# Altium PCB MotherBoard.PcbDoc
Units mm, origin at the board's own origin, x right, y up, seen from the top; angles counter-clockwise.
Board outline 70.48 x 74.55 mm, 2 copper layers (Top Layer, Bottom Layer); 21 components, 28 nets, 97 pads, 3 vias.
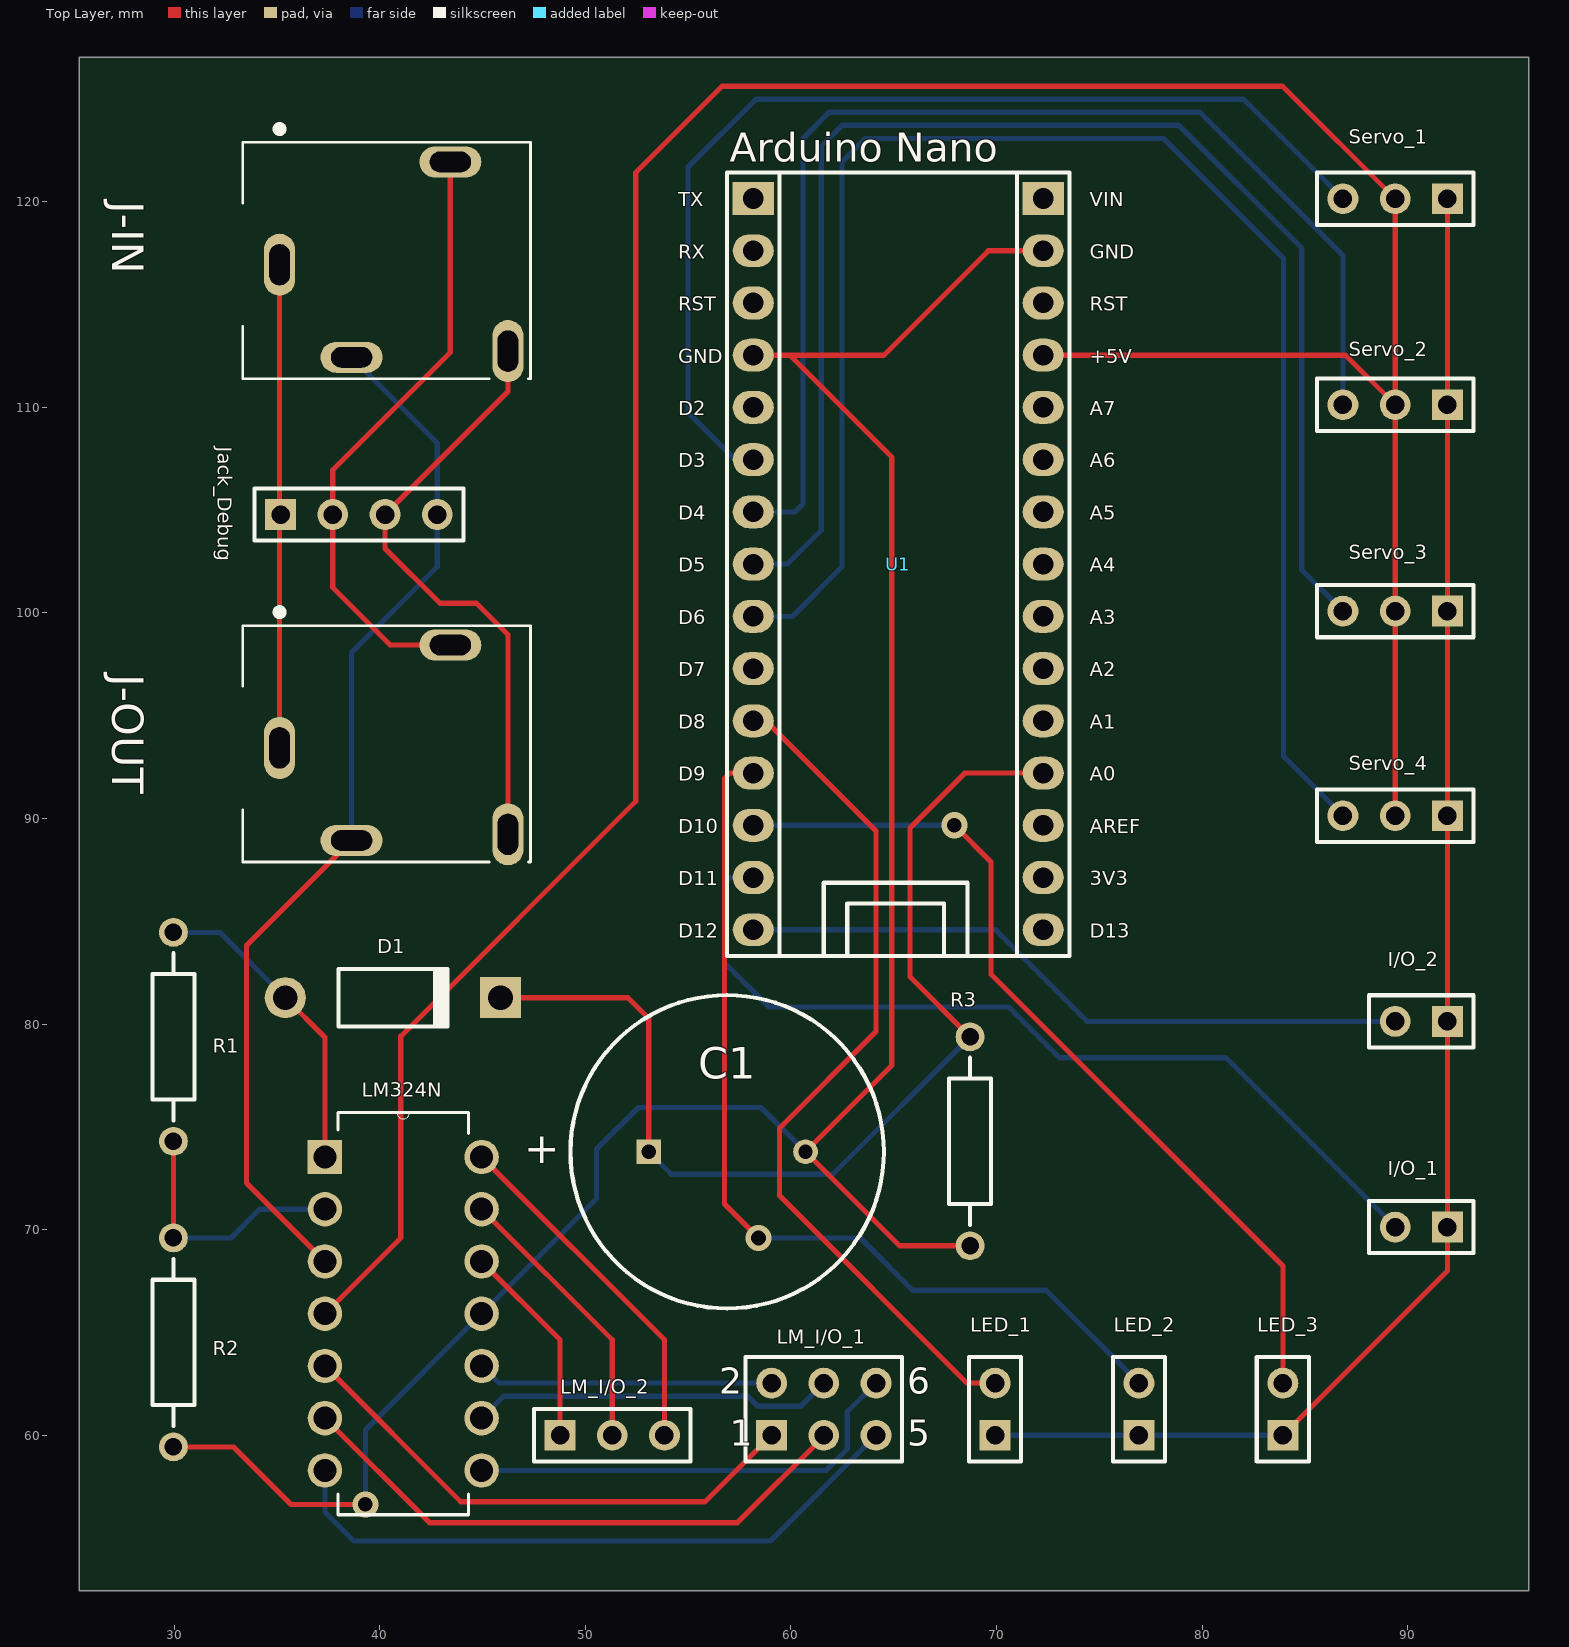
[diagram p0: Top Layer view]
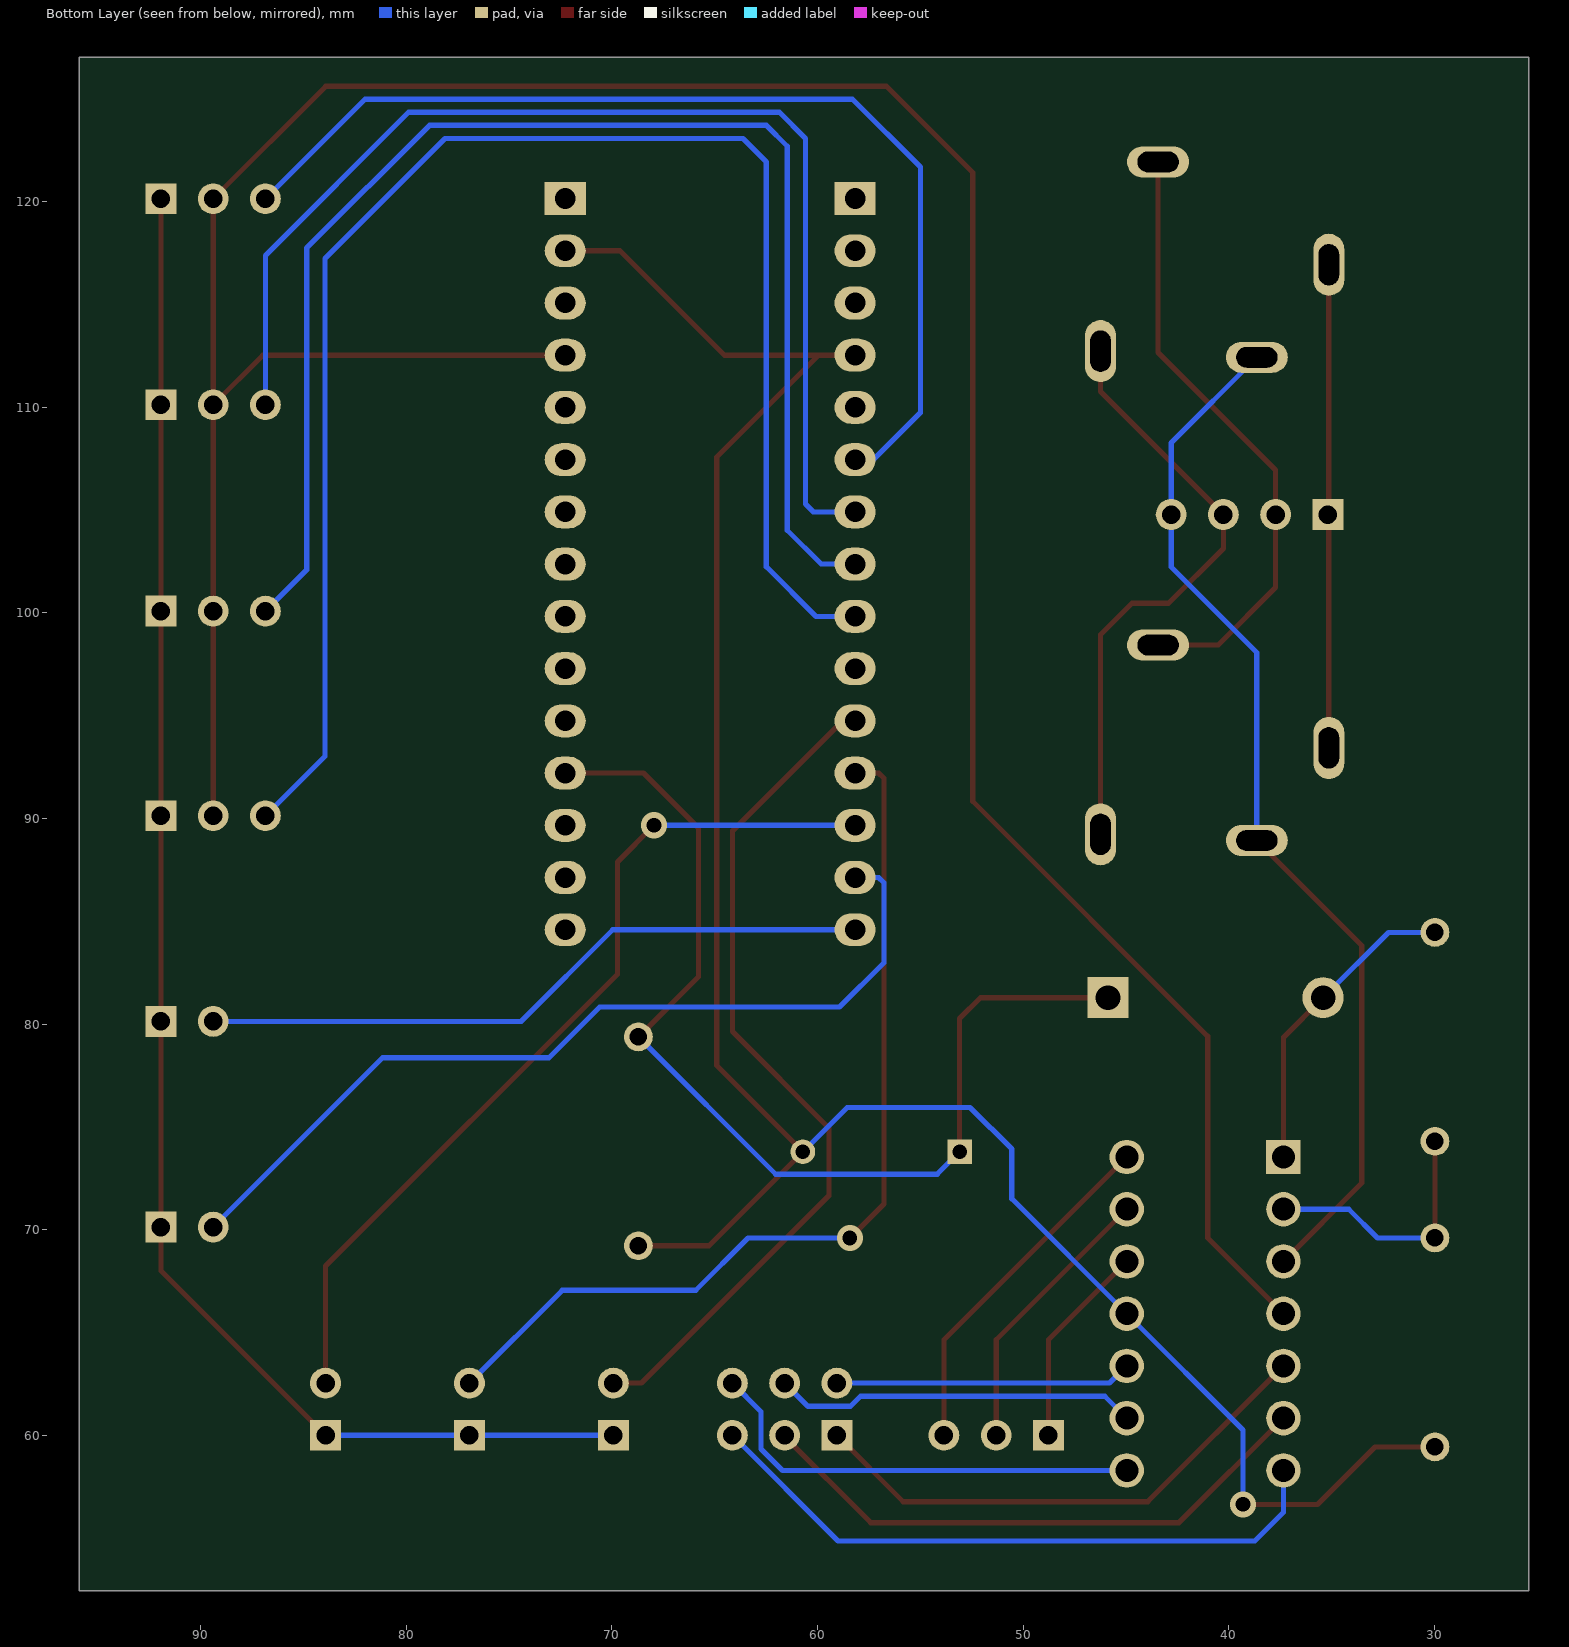
[diagram p1: Bottom Layer view, seen from below]

## Layer stack, top to bottom
Top Solder: solder mask 0.0102, Solder Resist, Dk 3.5
Top Layer: signal copper 0.0356
Dielectric 1: dielectric 0.32, FR-4, Dk 4.8
Bottom Layer: signal copper 0.0356
Bottom Solder: solder mask 0.0102, Solder Resist, Dk 3.5

## Board outline
25.4,52.451 95.885,52.451 95.885,127 25.4,127

## Design rules (kind name [scope] priority, off if disabled: settings)
Clearance [All] p1: gap=0.254 ignorepadtopadclearanceinfootprint=FALSE except(0: Arc-Hole Track-Hole SMDPad-Hole THPad-Hole Via-Hole Fill-Hole Poly-Hole Region-Hole Text-Hole)
PolygonConnect [All] p1: connectstyle=Relief reliefconductorwidth=0.254 reliefentries=4 polygonreliefangle="90 Angle" airgapwidth=0.254
RoutingVias [All] p1: holewidth=0.711 width=1.27 viastyle="Through Hole" minholewidth=0.711 minwidth=1.27 maxholewidth=0.711 maxwidth=1.27
SolderMaskExpansion [All] p1: expansion=0.102
Width [All] p1: maxlimit=0.254 minlimit=0.254 preferedwidth=0.254
30 further rules are at their usual default settings.

## Components (designator, comment, footprint, x,y, rotation, side; value= is the part's Value field where it differs from the comment)
C1 "Cap Pol1" RB7.6-15 56.896,73.787 r180 top value=47uF
D1 "Diode 1N4001" DO-41 40.64,81.28 r0 top
I/O_1 "I/O 1" HDR1X2 91.92,70.127 r180 top
I/O_2 "I/O 2" HDR1X2 91.92,80.127 r180 top
J-IN "SJ1-3514N" CUI_SJ1-3514N 35.134,116.92 r0 top
J-OUT "SJ1-3514N" CUI_SJ1-3514N 35.134,93.425 r0 top
Jack_Debug "Header 4" HDR1X4 35.179,104.775 r0 top
LED_1 "LED 1" HDR1X2 69.92,60 r90 top
LED_2 "LED 2" HDR1X2 76.92,60 r90 top
LED_3 "LED 3" HDR1X2 83.92,60 r90 top
LM324N "LM324N" DIP254P762X508-14 44.958,58.293 r0 top
LM_I/O_1 "Header 3X2" HDR2X3 59.055,60 r0 top
LM_I/O_2 "Header 3" HDR1X3 48.768,60 r0 top
R1 "Res2" AXIAL-0.4 29.972,79.375 r90 top value=46K
R2 "Res2" AXIAL-0.4 29.972,64.516 r270 top value=4.7K
R3 "Res2" AXIAL-0.4 68.707,74.295 r90 top value=3K
Servo_1 "Servo_1" HDR1X3 91.92,120.127 r180 top
Servo_2 "Servo_2" HDR1X3 91.92,110.109 r180 top
Servo_3 "Servo_3" HDR1X3 91.92,100.076 r180 top
Servo_4 "Servo_4" HDR1X3 91.92,90.127 r180 top
U1 "Arduino Nano" PCBCOMPONENT_1 65.024,101.346 r90 top

## Footprints (in the part's own frame and the unit in brackets; to place one, negate y for a bottom-side part, rotate by r counter-clockwise, add the part's x,y. Pads: shape width x height; smd on the part's side, far side on the other; paste and mask are expansions set on the pad)
AXIAL-0.4 [mm] "Axial Device, Thru-Hole; 2 Leads; 0.4 in Pin Spacing"
  round 1.4 hole 0.85: 1(-5.08,0) 2(5.08,0)
  silkscreen extent -4.06,-1.02 4.06,1.02
CUI_SJ1-3514N [mm]
  oval 1.508x3.016 hole 1 slot 2 at 90 deg: 1(0,0) 4(11.1,-4.2)
  oval 3.016x1.508 hole 1 slot 2 at 0 deg: 2(3.5,-4.5) 3(8.3,5)
  silkscreen extent -1.8,-5.55 12.2,6.77
DIP254P762X508-14 [mil]
  rect 66x66 hole 44: 1(-300,600)
  round 66 hole 44: 2(-300,500) 3(-300,400) 4(-300,300) 5(-300,200) 6(-300,100) 7(-300,0) 8(0,0) 9(0,100) 10(0,200) 11(0,300) 12(0,400) 13(0,500) 14(0,600)
  silkscreen extent -275,-85 -25,685
DO-41 [mm] "Diode, Axial; Body 5.2 x 2.7 mm (LxDia. max), Lead Dia. 0.86 mm (max)"
  round 2 hole 1.2: 1(-5.23,0)
  rect 2x2 hole 1.2: 2(5.23,0)
  silkscreen extent -2.65,-1.4 2.75,1.4
HDR1X2 [mm] "Connector; Header; 2 Position"
  rect 1.5x1.5 hole 0.9: 1(0,0)
  round 1.5 hole 0.9: 2(2.54,0)
  silkscreen extent -1.27,-1.27 3.81,1.27
HDR1X3 [mm] "Connector; Header; 3 Position"
  rect 1.5x1.5 hole 0.9: 1(0,0)
  round 1.5 hole 0.9: 2(2.54,0) 3(5.08,0)
  silkscreen extent -1.27,-1.27 6.35,1.27
HDR1X4 [mm] "Connector; Header; 4 Position"
  rect 1.5x1.5 hole 0.9: 1(0,0)
  round 1.5 hole 0.9: 2(2.54,0) 3(5.08,0) 4(7.62,0)
  silkscreen extent -1.27,-1.27 8.89,1.27
HDR2X3 [mm] "Connector; Header; 3x2 Position"
  rect 1.5x1.5 hole 0.9: 1(0,0)
  round 1.5 hole 0.9: 2(0,2.54) 3(2.54,0) 4(2.54,2.54) 5(5.08,0) 6(5.08,2.54)
  silkscreen extent -1.27,-1.27 6.35,3.81
PCBCOMPONENT_1 [mm]
  rect 1.6x2 hole 1: 1(18.796,6.858) 30(18.796,-7.239)
  oval 1.6x2 hole 1: 2(16.256,6.858) 3(13.716,6.858) 4(11.176,6.858) 5(8.636,6.858) 6(6.096,6.858) 7(3.556,6.858) 8(1.016,6.858) 9(-1.524,6.858) 10(-4.064,6.858) 11(-6.604,6.858) 12(-9.144,6.858) 13(-11.684,6.858) 14(-14.224,6.858) 15(-16.764,6.858) 16(-16.764,-7.239) 17(-14.224,-7.239) 18(-11.684,-7.239) 19(-9.144,-7.239) 20(-6.604,-7.239) 21(-4.064,-7.239) 22(-1.524,-7.239) 23(1.016,-7.239) 24(3.556,-7.239) 25(6.096,-7.239) 26(8.636,-7.239) 27(11.176,-7.239) 28(13.716,-7.239) 29(16.256,-7.239)
  silkscreen extent -18.03,-8.51 20.07,8.13
RB7.6-15 [mm] "Polarized Capacitor (Radial); 2 Leads"
  rect 1.2x1.2 hole 0.7: 1(3.81,0)
  round 1.2 hole 0.7: 2(-3.81,0)
  silkscreen extent -7.62,-7.62 7.62,7.62

## Part data
C1: "Polarized Capacitor (Radial)", LatestRevisionDate=17-Jul-2002, LatestRevisionNote="Re-released for DXP Platform.", PackageDescription="Polarized Capacitor (Radial); 2 Leads", PackageReference=RB7.6-15, Published=8-Jun-2000, Publisher="Altium Limited"
D1: "1 Amp General Purpose Rectifier", Code_JEDEC=DO-204-AL, ComponentLink1Description="Manufacturer Link", ComponentLink1URL=http://www.fairchildsemi.com/, ComponentLink2Description=Datasheet, ComponentLink2URL=http://www.fairchildsemi.com/ds/1N%2F1N4001.pdf, DatasheetVersion=1998, LatestRevisionDate=17-Jul-2002, LatestRevisionNote="Re-released for DXP Platform.", PackageDescription="Diode, Axial; Body 5.2 x 2.7 mm (LxDia. max), Lead Dia. 0.86 mm (max)", PackageReference=DO-41, PackageVersion=Aug-1999, Published=8-Jun-2000, Publisher="Altium Limited"
I/O_1 I/O_2 LED_1 LED_2 LED_3: library part "Header 2", "Header, 2-Pin", LatestRevisionDate=17-Jul-2002, LatestRevisionNote="Re-released for DXP Platform.", Publisher="Altium Limited"
J-IN J-OUT: "3.5 mm, Stereo, Right Angle, Through Hole, Audio Jack Connector", Package=None, Availability=Unavailable, CUI_purchase_URL=https://www.cuidevices.com/product/interconnect/connectors/audio-connectors/jacks/sj1-351xn-series?utm_source=snapeda.com&utm_medium=referral&utm_campaign=snapedaBOM, MF="CUI Devices", MP=SJ1-3514N, Price=None, SnapEDA_Link=https://www.snapeda.com/parts/SJ1-3514N/CUI%20Devices/view-part/617955/?ref=snap
Jack_Debug: "Header, 4-Pin", LatestRevisionDate=17-Jul-2002, LatestRevisionNote="Re-released for DXP Platform.", Publisher="Altium Limited"
LM324N: "General Purpose Amplifier 4 Circuit 14-PDIP", Package="DIP-14 Texas Instruments", Availability=Unavailable, MF="Texas Instruments", MP=LM324N/NOPB, Price=None, SnapEDA_Link=https://www.snapeda.com/parts/LM324N/NOPB/Texas%20Instruments/view-part/18367/?ref=snap
LM_I/O_1: "Header, 3-Pin, Dual row", LatestRevisionDate=17-Jul-2002, LatestRevisionNote="Re-released for DXP Platform.", Publisher="Altium Limited"
LM_I/O_2: "Header, 3-Pin", LatestRevisionDate=17-Jul-2002, LatestRevisionNote="Re-released for DXP Platform.", Publisher="Altium Limited"
R1 R2 R3: "Resistor", LatestRevisionDate=17-Jul-2002, LatestRevisionNote="Re-released for DXP Platform.", PackageDescription="Axial Device, Thru-Hole; 2 Leads; 0.4 in Pin Spacing", PackageReference=AXIAL-0.4, Published=8-Jun-2000, Publisher="Altium Limited"
Servo_1 Servo_2 Servo_3 Servo_4: library part "Header 3", "Header, 3-Pin", LatestRevisionDate=17-Jul-2002, LatestRevisionNote="Re-released for DXP Platform.", Publisher="Altium Limited"
U1: library part Component_1

## Via types
v1: diameter 1.27, hole 0.711, Top Layer to Bottom Layer, 3 vias

## Nets (pads, with @x,y where several pads share a name; then routed paths per layer and width w, separated by ;. In a path a pad name is that pad's centre, name@x,y a point inside that pad or via, vN(x,y) a via of type N, cw(c..) or ccw(c..) an arc to the next point about the centre after c; other vN are vias at no path point)
GND: C1.2 LM324N.11 R2.2 R3.1 U1.4 U1.29 | length 112.9
  Top Layer w0.254: R2.2 32.893,59.436 35.687,56.642 v1(39.306,56.642) ; U1.4 59.944,112.522 ; R3.1 65.278,69.215 C1.2 64.897,77.978 64.897,107.569 59.944,112.522 ; U1.29 69.596,117.602 64.516,112.522 59.944,112.522
  Bottom Layer w0.254: v1(39.306,56.642) 39.306,60.261 LM324N.11 50.546,71.501 50.546,73.914 52.578,75.946 58.547,75.946 C1.2
NetC1_1: C1.1 D1.2 R3.2 U1.19 | length 51.9
  Top Layer w0.254: D1.2 52.07,81.28 53.086,80.264 C1.1 ; R3.2 65.786,82.296 65.786,89.535 68.453,92.202 U1.19
  Bottom Layer w0.254: C1.1 54.178,72.695 62.027,72.695 R3.2
NetD1_1: D1.1 LM324N.1 R1.2 | length 15.3
  Top Layer w0.254: D1.1 37.338,79.352 LM324N.1
  Bottom Layer w0.254: R1.2 32.235,84.455 D1.1
NetI/O_1_1: I/O_1.1 I/O_2.1 LED_1.1 LED_2.1 LED_3.1 Servo_1.1 Servo_2.1 Servo_3.1 Servo_4.1 | length 77.4
  Top Layer w0.254: LED_3.1 91.92,68 I/O_1.1 I/O_2.1 Servo_4.1 Servo_3.1 Servo_2.1 Servo_1.1
  Bottom Layer w0.254: LED_1.1 LED_2.1 LED_3.1
NetI/O_1_2: I/O_1.2 U1.14 | length 43.3
  Bottom Layer w0.254: U1.14 57.023,87.122 56.769,86.868 56.769,82.982 58.928,80.823 70.587,80.823 73.05,78.359 81.148,78.359 I/O_1.2
NetI/O_2_2: I/O_2.2 U1.15 | length 33.1
  Bottom Layer w0.254: U1.15 69.952,84.582 74.407,80.127 I/O_2.2
NetJ-IN_1: J-IN.1 J-OUT.1 Jack_Debug.1 | length 23.5
  Top Layer w0.254: J-OUT.1 35.134,104.73 Jack_Debug.1 35.134,104.82 J-IN.1
NetJ-IN_2: J-IN.2 J-OUT.2 Jack_Debug.4 LM324N.3 | length 51.1
  Top Layer w0.254: LM324N.3 33.528,72.263 33.528,83.819 J-OUT.2
  Bottom Layer w0.254: J-OUT.2 38.634,98.07 42.799,102.235 Jack_Debug.4 42.799,108.255 J-IN.2
NetJ-IN_3: J-IN.3 J-OUT.3 Jack_Debug.2 | length 29.9
  Top Layer w0.254: J-OUT.3 40.513,98.425 37.719,101.219 Jack_Debug.2 37.719,106.934 43.434,112.649 J-IN.3
NetJ-IN_4: J-IN.4 J-OUT.4 Jack_Debug.3 | length 29.5
  Top Layer w0.254: J-OUT.4 46.234,98.927 44.704,100.457 42.926,100.457 40.259,103.124 Jack_Debug.3 46.234,110.75 J-IN.4
NetLED_1_2: LED_1.2 U1.11 | length 42.1
  Top Layer w0.254: U1.11 58.785,94.742 64.135,89.392 64.135,79.629 59.436,74.93 59.436,71.653 68.549,62.54 LED_1.2
NetLED_2_2: LED_2.2 U1.12 | length 46
  Top Layer w0.254: U1.12 57.023,92.202 56.769,91.948 56.769,71.247 v1(58.42,69.596)
  Bottom Layer w0.254: v1(58.42,69.596) 63.373,69.596 65.913,67.056 72.404,67.056 LED_2.2
NetLED_3_2: LED_3.2 U1.13 | length 43.5
  Top Layer w0.254: v1(67.945,89.662) 69.723,87.884 69.723,82.423 83.92,68.226 LED_3.2
  Bottom Layer w0.254: U1.13 v1(67.945,89.662)
NetLM324N_2: LM324N.2 R1.1 R2.1 | length 12.6
  Top Layer w0.254: R2.1 R1.1
  Bottom Layer w0.254: R2.1 32.766,69.596 34.163,70.993 LM324N.2
NetLM324N_4: LM324N.4 Servo_1.2 Servo_2.2 Servo_3.2 Servo_4.2 U1.27 | length 150.8
  Top Layer w0.254: LM324N.4 41.021,69.596 41.021,79.4 52.451,90.83 52.451,121.412 56.642,125.603 83.904,125.603 Servo_1.2 Servo_2.2 ; U1.27 86.967,112.522 Servo_2.2 ; Servo_4.2 Servo_3.2 Servo_2.2
NetLM324N_5: LM324N.5 LM_I/O_1.1 | length 25.8
  Top Layer w0.254: LM324N.5 43.942,56.769 55.824,56.769 LM_I/O_1.1
NetLM324N_6: LM324N.6 LM_I/O_1.3 | length 28.2
  Top Layer w0.254: LM324N.6 42.418,55.753 57.404,55.753 61.595,59.944 LM_I/O_1.3
NetLM324N_7: LM324N.7 LM_I/O_1.5 | length 31.5
  Bottom Layer w0.254: LM324N.7 37.338,56.261 38.735,54.864 58.999,54.864 LM_I/O_1.5
NetLM324N_8: LM324N.8 LM_I/O_1.6 | length 22
  Bottom Layer w0.254: LM324N.8 61.697,58.293 62.738,59.334 62.738,61.143 LM_I/O_1.6
NetLM324N_9: LM324N.9 LM_I/O_1.4 | length 17.8
  Bottom Layer w0.254: LM324N.9 46.025,61.9 57.912,61.9 58.403,61.409 60.464,61.409 LM_I/O_1.4
NetLM324N_10: LM324N.10 LM_I/O_1.2 | length 14.4
  Bottom Layer w0.254: LM324N.10 45.791,62.54 LM_I/O_1.2
NetLM324N_12: LM324N.12 LM_I/O_2.1 | length 10
  Top Layer w0.254: LM324N.12 48.768,64.643 LM_I/O_2.1
NetLM324N_13: LM324N.13 LM_I/O_2.2 | length 13.6
  Top Layer w0.254: LM324N.13 51.308,64.643 LM_I/O_2.2
NetLM324N_14: LM324N.14 LM_I/O_2.3 | length 17.2
  Top Layer w0.254: LM324N.14 53.848,64.643 LM_I/O_2.3
NetServo_1_3: Servo_1.3 U1.6 | length 51.3
  Bottom Layer w0.254: U1.6 57.277,107.442 54.991,109.728 54.991,121.666 58.293,124.968 81.999,124.968 Servo_1.3
NetServo_2_3: Servo_2.3 U1.7 | length 57.3
  Bottom Layer w0.254: U1.7 60.198,104.902 60.579,105.283 60.579,123.063 61.849,124.333 79.883,124.333 86.84,117.376 Servo_2.3
NetServo_3_3: Servo_3.3 U1.8 | length 67.4
  Bottom Layer w0.254: U1.8 59.817,102.362 61.468,104.013 61.468,122.682 62.484,123.698 78.867,123.698 84.836,117.729 84.836,102.08 Servo_3.3
NetServo_4_3: Servo_4.3 U1.9 | length 77.7
  Bottom Layer w0.254: U1.9 60.071,99.822 62.484,102.235 62.484,121.92 63.627,123.063 78.105,123.063 83.947,117.221 83.947,93.02 Servo_4.3
pads on no net: U1.1 U1.2 U1.3 U1.5 U1.10 U1.16 U1.17 U1.18 U1.20 U1.21 U1.22 U1.23 U1.24 U1.25 U1.26 U1.28 U1.30

## Text inside footprints (layer, text, board x,y; h text height)
C1: Top Overlay "+" at 48.764,74.524 h1.5 r180
LM_I/O_1: Top Overlay "1" at 57.023,59.492 h1.27; Top Overlay "2" at 56.515,62.032 h1.27; Top Overlay "5" at 65.659,59.492 h1.27; Top Overlay "6" at 65.659,62.032 h1.27
U1: Top Overlay "3V3" at 74.524,86.741 h0.7; Top Overlay "AREF" at 74.524,89.281 h0.7; Top Overlay "A0" at 74.524,91.821 h0.7; Top Overlay "A1" at 74.524,94.361 h0.7; Top Overlay "A2" at 74.524,96.901 h0.7; Top Overlay "A3" at 74.524,99.441 h0.7; Top Overlay "A4" at 74.524,101.981 h0.7; Top Overlay "A5" at 74.524,104.521 h0.7; Top Overlay "A6" at 74.524,107.061 h0.7; Top Overlay "A7" at 74.524,109.601 h0.7; Top Overlay "+5V" at 74.524,112.141 h0.7; Top Overlay "RST" at 74.524,114.681 h0.7; Top Overlay "GND" at 74.524,117.221 h0.7; Top Overlay "D13" at 74.524,84.201 h0.7; Top Overlay "D12" at 54.524,84.201 h0.7; Top Overlay "D11" at 54.524,86.741 h0.7; Top Overlay "D10" at 54.524,89.281 h0.7; Top Overlay "D9" at 54.524,91.821 h0.7; Top Overlay "D8" at 54.524,94.361 h0.7; Top Overlay "D7" at 54.524,96.901 h0.7; Top Overlay "D6" at 54.524,99.441 h0.7; Top Overlay "D5" at 54.524,101.981 h0.7; Top Overlay "D4" at 54.524,104.521 h0.7; Top Overlay "D3" at 54.524,107.061 h0.7; Top Overlay "D2" at 54.524,109.601 h0.7; Top Overlay "GND" at 54.524,112.141 h0.7; Top Overlay "RST" at 54.524,114.681 h0.7; Top Overlay "RX" at 54.524,117.221 h0.7; Top Overlay "TX" at 54.524,119.761 h0.7; Top Overlay "VIN" at 74.524,119.761 h0.7